# Altium PCB ap-pam-VX.PcbDoc (part 2 of 2)
Units mm, origin at the board's own origin, x right, y up, seen from the top; angles counter-clockwise.
Board outline 190.5 x 50.8 mm, 2 copper layers (Top Layer, Bottom Layer), stack 0.579 mm thick; 74 components, 43 nets, 478 pads, 486 vias.
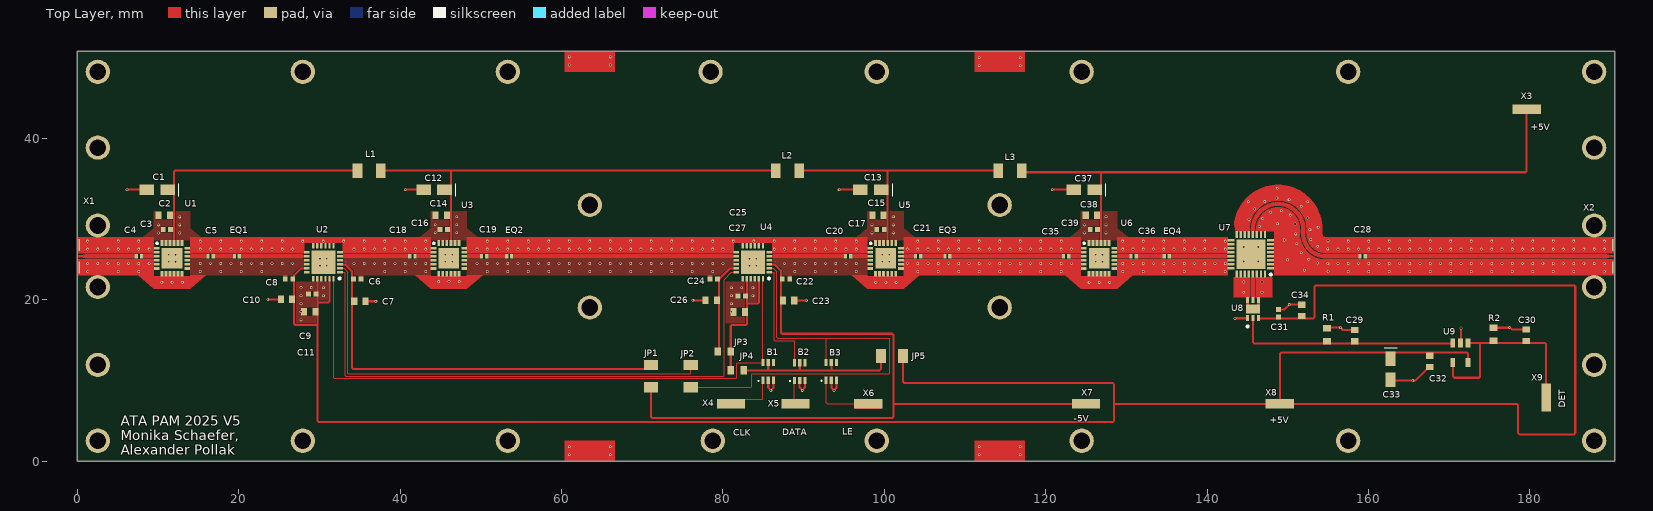
[diagram p0: Top Layer view]

## Via types
v1: diameter 0.35, hole 0.2, Top Layer to Bottom Layer, 486 vias

## Nets (pads, with @x,y where several pads share a name; then routed paths per layer and width w, separated by ;. In a path a pad name is that pad's centre, name@x,y a point inside that pad or via, vN(x,y) a via of type N, cw(c..) or ccw(c..) an arc to the next point about the centre after c; other vN are vias at no path point) (continued)
pads on no net: B1.1@84.963,10.027 B1.2@85.613,10.027 B1.3@86.263,10.027 B1.4 B1.5@85.613,12.227 B1.6@84.963,12.227 B2.1@88.858,10.003 B2.2@89.508,10.003 B2.3@90.158,10.003 B2.4 B2.5@89.508,12.203 B2.6@88.858,12.203 B3.1@92.785,10.034 B3.2@93.435,10.034 B3.3@94.085,10.034 B3.4 B3.5@93.435,12.234 B3.6@92.785,12.234 U1.1@9.835,26.4 U1.2@9.835,25.9 U1.3@9.835,25.4 U1.4@9.835,24.9 U1.5@9.835,24.4 U1.6@9.835,23.9 U1.7@10.485,23.25 U1.8@10.985,23.25 U1.9@11.485,23.25 U1.10@11.985,23.25 U1.11@12.485,23.25 U1.12@12.985,23.25 U1.13@13.635,23.9 U1.14@13.635,24.4 U1.15@13.635,24.9 U1.16@13.635,25.4 U1.17@13.635,25.9 U1.18@13.635,26.4 U1.19@12.985,27.05 U1.20@12.485,27.05 U1.21@11.985,27.05 U1.22@11.485,27.05 U1.23@10.985,27.05 U1.24@10.485,27.05 U1.25@11.735,25.15 U2.18 U3.1@44.138,26.4 U3.2@44.138,25.9 U3.3@44.138,25.4 U3.4@44.138,24.9 U3.5@44.138,24.4 U3.6@44.138,23.9 U3.7@44.788,23.25 U3.8@45.288,23.25 U3.9@45.788,23.25 U3.10@46.288,23.25 U3.11@46.788,23.25 U3.12@47.288,23.25 U3.13@47.938,23.9 U3.14@47.938,24.4 U3.15@47.938,24.9 U3.16@47.938,25.4 U3.17@47.938,25.9 U3.18@47.938,26.4 U3.19@47.288,27.05 U3.20@46.788,27.05 U3.21@46.288,27.05 U3.22@45.788,27.05 U3.23@45.288,27.05 U3.24@44.788,27.05 U3.25@46.038,25.15 U5.1@98.263,26.4 U5.2@98.263,25.9 U5.3@98.263,25.4 U5.4@98.263,24.9 U5.5@98.263,24.4 U5.6@98.263,23.9 U5.7@98.913,23.25 U5.8@99.413,23.25 U5.9@99.913,23.25 U5.10@100.413,23.25 U5.11@100.913,23.25 U5.12@101.413,23.25 U5.13@102.063,23.9 U5.14@102.063,24.4 U5.15@102.063,24.9 U5.16@102.063,25.4 U5.17@102.063,25.9 U5.18@102.063,26.4 U5.19@101.413,27.05 U5.20@100.913,27.05 U5.21@100.413,27.05 U5.22@99.913,27.05 U5.23@99.413,27.05 U5.24@98.913,27.05 U5.25@100.163,25.15 U6.1@124.707,26.4 U6.2@124.707,25.9 U6.3@124.707,25.4 U6.4@124.707,24.9 U6.5@124.707,24.4 U6.6@124.707,23.9 U6.7@125.357,23.25 U6.8@125.857,23.25 U6.9@126.357,23.25 U6.10@126.857,23.25 U6.11@127.357,23.25 U6.12@127.857,23.25 U6.13@128.507,23.9 U6.14@128.507,24.4 U6.15@128.507,24.9 U6.16@128.507,25.4 U6.17@128.507,25.9 U6.18@128.507,26.4 U6.19@127.857,27.05 U6.20@127.357,27.05 U6.21@126.857,27.05 U6.22@126.357,27.05 U6.23@125.857,27.05 U6.24@125.357,27.05 U6.25@126.607,25.15

## Polygon pours and split planes (outlines as drawn)
GND on Bottom Layer "GND_L02_P000" (solid, pour order 0): 0,0 190.5,0 190.5,50.8 0,50.8
GND on Top Layer "GND_L01_P033" (solid, pour order 33): 124.351,30.959 128.859,30.959 128.861,28.895 130.645,27.395 122.558,27.395 124.345,28.895
GND on Top Layer "GND_L01_P032" (solid, pour order 32): 97.907,30.959 102.415,30.959 102.417,28.895 104.201,27.395 96.114,27.395 97.901,28.895
GND on Top Layer "GND_L01_P031" (solid, pour order 31): 43.765,30.96 48.281,30.96 48.281,28.899 50.065,27.399 41.978,27.399 43.765,28.899
GND on Top Layer "GND_L01_P030" (solid, pour order 30): 9.469,30.959 13.985,30.959 13.985,28.899 15.769,27.399 7.682,27.399 9.469,28.899
GND on Top Layer "GND_L01_P026" (solid, pour order 26): 80.162,22.257 84.424,22.257 84.424,19.542 83.001,19.542 83.001,17.121 80.162,17.121
GND on Top Layer "GND_L01_P025" (solid, pour order 25): 26.882,22.25 31.19,22.25 31.19,19.679 29.767,19.679 29.767,16.888 26.882,16.888
GND on Top Layer "GND_L01_P024" (solid, pour order 24): 86.11,25.017 97.913,25.017 97.913,23.017 86.11,23.017
GND on Top Layer "GND_L01_P023" (solid, pour order 23): 48.287,25.017 81.312,25.017 81.312,23.017 48.287,23.017
GND on Top Layer "GND_L01_P022" (solid, pour order 22): 32.899,25.017 43.789,25.017 43.789,23.017 32.899,23.017
GND on Top Layer "GND_L01_P021" (solid, pour order 21): 13.984,25.017 28.1,25.017 28.1,23.017 13.984,23.017

## Other copper
Top Layer:
  rectangle net C36: 131.372,25.131 134.607,25.669
  rectangle net U9: 128.967,25.131 130.436,25.669
  rectangle net C35: 122.879,25.131 124.246,25.669
  rectangle net EQ3: 108.22,25.131 122.042,25.669
  rectangle net RFout: 159.727,25.131 189.5,25.669
  region net U6_2: 145.401,22.634 145.401,20.446 145.939,20.446 145.939,22.634
  rectangle net U6_1: 154.668,25.131 158.819,25.669
  rectangle net GND: 25.473,22.868 26.073,23.072
  rectangle net GND: 78.107,22.903 78.707,23.051
  rectangle net GND: 87.979,22.895 88.579,23.028
  rectangle net GND: 34.859,22.904 35.459,23.038
  rectangle net EQ4: 135.465,25.131 142.404,25.669
  rectangle net RFin: 1,25.131 7.105,25.669
  rectangle net C4: 8.136,25.131 9.375,25.669
  rectangle net EQ1: 20.263,25.131 27.958,25.669
  rectangle net U2: 33.04,25.131 40.992,25.669
  rectangle net C18: 42.026,25.131 43.677,25.669
  rectangle net C5: 17.031,25.131 19.272,25.669
  rectangle net U1: 14.096,25.131 15.989,25.669
  rectangle net U5: 102.523,25.131 103.678,25.669
  rectangle net C21: 104.72,25.131 107.319,25.669
  rectangle net C20: 96.03,25.131 97.803,25.669
  rectangle net C19: 50.923,25.131 53.011,25.669
  rectangle net U3: 48.399,25.131 49.892,25.669
  rectangle net EQ2: 54.004,25.131 81.17,25.669
  rectangle net U4: 86.252,25.131 94.991,25.669
  rectangle net GND: 111.16,0 117.44,2.54
  rectangle net GND: 60.36,0 66.64,2.54
  rectangle net GND: 111.16,48.26 117.44,50.8
  rectangle net GND: 60.36,48.26 66.64,50.8
  region net GND: 128.857,25.075 128.929,25.014 128.857,25.014
  region net GND: 124.357,25.075 124.285,25.014 124.357,25.014
  region net GND: 124.357,25.725 124.285,25.786 124.357,25.786
  region net GND: 128.857,25.725 128.929,25.786 128.857,25.786
  region net GND: 102.413,25.075 102.485,25.014 102.413,25.014
  region net GND: 122.411,23.017 124.357,23.017 124.357,22.901 128.857,22.901 128.857,23.017 130.78,23.017 128.857,21.401 124.341,21.401
  pour cut-out: 126.247,28.3 125.211,28.3 125.211,29.12 126.247,29.12
  pour cut-out: 124.582,31.06 126.5,31.06 126.5,29.92 124.582,29.92
  region net GND: 128.857,25.017 142.545,25.017 142.545,23.017 128.857,23.017
  region net GND: 128.856,27.786 142.545,27.786 142.545,25.786 128.856,25.786
  region net U9: 128.967,25.669 128.857,25.575 128.857,25.225 128.967,25.131
  region net GND: 102.413,27.786 124.358,27.786 124.358,25.786 102.413,25.786
  region net C35: 124.246,25.669 124.357,25.575 124.357,25.225 124.246,25.131
  region net GND: 145.32,28.525 145.284,28.525 145.284,28.667
  region net GND: 146.02,28.525 146.064,28.525 146.064,28.698
  region net GND: 154.707,27.783 189.517,27.783 189.517,25.783 154.707,25.783
  region net GND: 154.288,28.686 154.287,28.25 154.094,28.443
  region net GND: 147.319,28.525 148.295,28.525 148.295,25.017 150.622,25.017 150.622,29.763 147.319,29.763
  region net U6_1: 151.641,28.765 152.179,28.765 152.176,28.122 151.638,28.124
  region net GND: 152.293,28.708 152.291,28.232 152.574,28.522
  region net GND: 151.523,28.706 151.521,28.245 151.311,28.507
  region net GND: 146.114,29.207 146.092,28.525 147.125,28.525 147.125,29.207
  region net GND: 145.177,29.243 145.121,28.525 143.52,28.525 143.374,29.316
  region net U6_1: 145.401,28.666 145.939,28.666 145.939,28.765 145.401,28.765
  region net GND: 145.287,20.335 145.169,20.335 145.169,20.194
  region net GND: 146.053,20.335 146.171,20.335 146.171,20.194
  region net GND: 97.913,25.725 97.841,25.786 97.913,25.786
  region net GND: 145.32,22.775 145.287,22.775 145.287,22.634
  region net GND: 146.02,22.775 146.053,22.775 146.053,22.634
  region net GND: 142.545,25.75 142.545,25.786 142.403,25.786
  region net GND: 142.545,25.05 142.545,25.017 142.404,25.017
  region net GND: 102.413,25.017 124.357,25.017 124.357,23.017 102.413,23.017
  region net U6_1: 145.401,28.666 145.52,28.525 145.82,28.525 145.939,28.666
  region net GND: 148.053,22.775 148.053,20.335 146.053,20.335 146.053,22.775
  region net GND: 145.287,22.775 145.287,20.335 143.287,20.335 143.287,22.775
  region net EQ4: 142.404,25.131 142.545,25.25 142.545,25.55 142.404,25.669
  region net U6_2: 145.939,22.634 145.82,22.775 145.52,22.775 145.401,22.634
  region net U6_2: 145.939,20.446 145.845,20.335 145.495,20.335 145.401,20.446
  region net GND: 33.28,24.598 33.086,24.737 33.336,24.737 33.357,24.715
  region net GND: 86.501,24.598 86.321,24.727 86.563,24.727 86.568,24.723
  region net GND: 95.967,23.017 97.913,23.017 97.913,22.901 102.413,22.901 102.413,23.017 104.336,23.017 102.413,21.401 97.897,21.401
  region net GND: 41.844,23.017 43.789,23.017 43.789,22.901 48.287,22.901 48.287,23.017 50.212,23.017 48.287,21.401 43.77,21.401
  region net GND: 148.295,25.017 189.5,25.017 189.5,23.017 148.295,23.017
  region net GND: 1,25.017 9.485,25.017 9.485,23.017 1,23.017
  region net GND: 7.542,23.017 9.485,23.017 9.485,22.901 13.984,22.901 13.984,23.017 15.907,23.017 13.984,21.401 9.468,21.401
  region net GND: 1,27.783 9.477,27.783 9.488,25.783 1,25.783
  region net GND: 48.281,27.783 97.913,27.783 97.913,25.783 86.111,25.783 86.111,27.047 81.311,27.047 81.311,25.783 48.281,25.783
  region net GND: 13.985,27.783 43.79,27.783 43.79,25.783 32.899,25.783 32.899,27.047 28.099,27.047 28.099,25.783 13.985,25.783
  region net EQ1: 27.958,25.669 28.099,25.55 28.099,25.25 27.958,25.131
  region net GND: 81.311,25.05 81.311,25.017 81.17,25.017
  region net GND: 28.099,25.75 28.099,25.783 27.958,25.783
  region net GND: 28.099,25.05 28.099,25.017 27.958,25.017
  region net U2: 33.04,25.669 32.899,25.55 32.899,25.25 33.04,25.131
  region net GND: 32.899,25.75 32.899,25.783 33.041,25.783
  region net GND: 32.899,25.05 32.899,25.017 33.041,25.017
  region net GND: 86.111,25.05 86.111,25.017 86.252,25.017
  region net GND: 86.111,25.75 86.111,25.783 86.252,25.783
  region net U4: 86.252,25.669 86.111,25.55 86.111,25.25 86.252,25.131
  region net EQ2: 81.17,25.669 81.311,25.55 81.311,25.25 81.17,25.131
  region net GND: 81.311,25.75 81.311,25.783 81.169,25.783
  pour cut-out: 80.937,19.067 82.774,19.067 82.774,17.927 80.937,17.927
  pour cut-out: 82.778,20.078 81.569,20.078 81.569,20.898 82.778,20.898
  pour cut-out: 29.572,20.33 28.356,20.33 28.356,21.15 29.572,21.15
  pour cut-out: 27.724,19.084 29.518,19.084 29.518,17.944 27.724,17.944
  region net GND: 43.788,25.725 43.716,25.786 43.788,25.786
  region net GND: 102.413,25.725 102.485,25.786 102.413,25.786
  region net U5: 102.524,25.669 102.413,25.575 102.413,25.225 102.524,25.131
  region net GND: 97.913,25.075 97.841,25.014 97.913,25.014
  region net C4: 9.375,25.669 9.485,25.575 9.485,25.225 9.375,25.131
  region net C20: 97.802,25.669 97.913,25.575 97.913,25.225 97.802,25.131
  pour cut-out: 98.138,31.06 99.477,31.06 99.477,29.92 98.138,29.92
  pour cut-out: 99.641,28.3 98.768,28.3 98.768,29.12 99.641,29.12
  region net GND: 48.288,25.075 48.36,25.014 48.288,25.014
  region net U3: 48.399,25.669 48.288,25.575 48.288,25.225 48.399,25.131
  region net GND: 48.288,25.725 48.36,25.786 48.288,25.786
  region net GND: 43.788,25.075 43.716,25.014 43.788,25.014
  region net C18: 43.677,25.669 43.788,25.575 43.788,25.225 43.677,25.131
  pour cut-out: 45.516,28.3 44.643,28.3 44.643,29.12 45.516,29.12
  pour cut-out: 44.013,31.06 45.352,31.06 45.352,29.92 44.013,29.92
  pour cut-out: 11.213,28.3 10.341,28.3 10.341,29.12 11.213,29.12
  pour cut-out: 9.712,31.06 11.049,31.06 11.049,29.92 9.712,29.92
  region net GND: 13.985,25.725 14.058,25.786 13.985,25.786
  region net U1: 14.096,25.669 13.985,25.575 13.985,25.225 14.096,25.131
  region net GND: 13.985,25.075 14.058,25.014 13.985,25.014
  region net GND: 9.485,25.725 9.413,25.786 9.485,25.786
  region net GND: 9.485,25.075 9.413,25.014 9.485,25.014

## Silkscreen, mask and mechanical layers (free items; w line width, h text height)
Top Overlay:
  text "+5V" at 180.105,41.023 h0.8
  text "DET" at 184.39,6.6 h0.8 r90
  text "-5V" at 123.444,4.914 h0.8
  text "+5V" at 147.759,4.711 h0.8
  text "LE" at 94.786,3.258 h0.8
  text "DATA" at 87.336,3.221 h0.8
  text "CLK" at 81.251,3.142 h0.8
  text "ATA PAM 2025 V5 / Monika Schaefer, / Alexander Pollak" at 5.368,0.814 h1.2
Top Solder:
  circle w1.5: c114.3,19.05 r0.75
  circle w1.5: c114.3,31.75 r0.75
  circle w1.5: c63.5,19.05 r0.75
  circle w1.5: c187.96,29.21 r0.75
  circle w1.5: c187.96,21.59 r0.75
  circle w1.5: c2.54,21.59 r0.75
  circle w1.5: c63.5,31.75 r0.75
  circle w1.5: c2.54,29.21 r0.75
  circle w1.5: c187.96,11.938 r0.75
  circle w1.5: c187.96,2.54 r0.75
  circle w1.5: c78.47,48.26 r0.75
  circle w1.5: c78.74,2.54 r0.75
  circle w1.5: c27.94,48.26 r0.75
  circle w1.5: c27.94,2.54 r0.75
  circle w1.5: c124.46,2.54 r0.75
  circle w1.5: c124.46,48.26 r0.75
  circle w1.5: c157.48,48.26 r0.75
  circle w1.5: c157.48,2.54 r0.75
  circle w1.5: c2.54,11.938 r0.75
  circle w1.5: c2.54,2.54 r0.75
  circle w1.5: c2.54,48.26 r0.75
  circle w1.5: c2.54,38.862 r0.75
  circle w1.5: c187.96,38.862 r0.75
  circle w1.5: c187.96,48.26 r0.75
  circle w1.5: c99.06,2.54 r0.75
  circle w1.5: c99.06,48.26 r0.75
  circle w1.5: c53.34,2.54 r0.75
  circle w1.5: c53.34,48.26 r0.75
  region: 0,0 190.5,0 190.5,50.8 0,50.8
Bottom Solder:
  circle w1.5: c114.3,19.05 r0.75
  circle w1.5: c114.3,31.75 r0.75
  circle w1.5: c63.5,19.05 r0.75
  circle w1.5: c187.96,29.21 r0.75
  circle w1.5: c187.96,21.59 r0.75
  circle w1.5: c2.54,21.59 r0.75
  circle w1.5: c63.5,31.75 r0.75
  circle w1.5: c2.54,29.21 r0.75
  circle w1.5: c187.96,11.938 r0.75
  circle w1.5: c187.96,2.54 r0.75
  circle w1.5: c78.47,48.26 r0.75
  circle w1.5: c78.74,2.54 r0.75
  circle w1.5: c27.94,48.26 r0.75
  circle w1.5: c27.94,2.54 r0.75
  circle w1.5: c124.46,2.54 r0.75
  circle w1.5: c124.46,48.26 r0.75
  circle w1.5: c157.48,48.26 r0.75
  circle w1.5: c157.48,2.54 r0.75
  circle w1.5: c2.54,11.938 r0.75
  circle w1.5: c2.54,2.54 r0.75
  circle w1.5: c2.54,48.26 r0.75
  circle w1.5: c2.54,38.862 r0.75
  circle w1.5: c187.96,38.862 r0.75
  circle w1.5: c187.96,48.26 r0.75
  circle w1.5: c99.06,2.54 r0.75
  circle w1.5: c99.06,48.26 r0.75
  circle w1.5: c53.34,2.54 r0.75
  circle w1.5: c53.34,48.26 r0.75
  region: 0,0 190.5,0 190.5,50.8 0,50.8
Board:
  the board outline again, w0.2